# Altium PCB PCB.PcbDoc (part 9 of 11)
Units mm, origin at the board's own origin, x right, y up, seen from the top; angles counter-clockwise.
Board outline 100.46 x 70.51 mm, 10 copper layers (L1(SIG), L2(GND), L3(PWR), L4(SIG), L5(GND), L6(SIG), L7(GND), L8(SIG), L9(GND), L10(SIG)), stack 1.49 mm thick; 425 components, 324 nets, 2004 pads, 1425 vias.
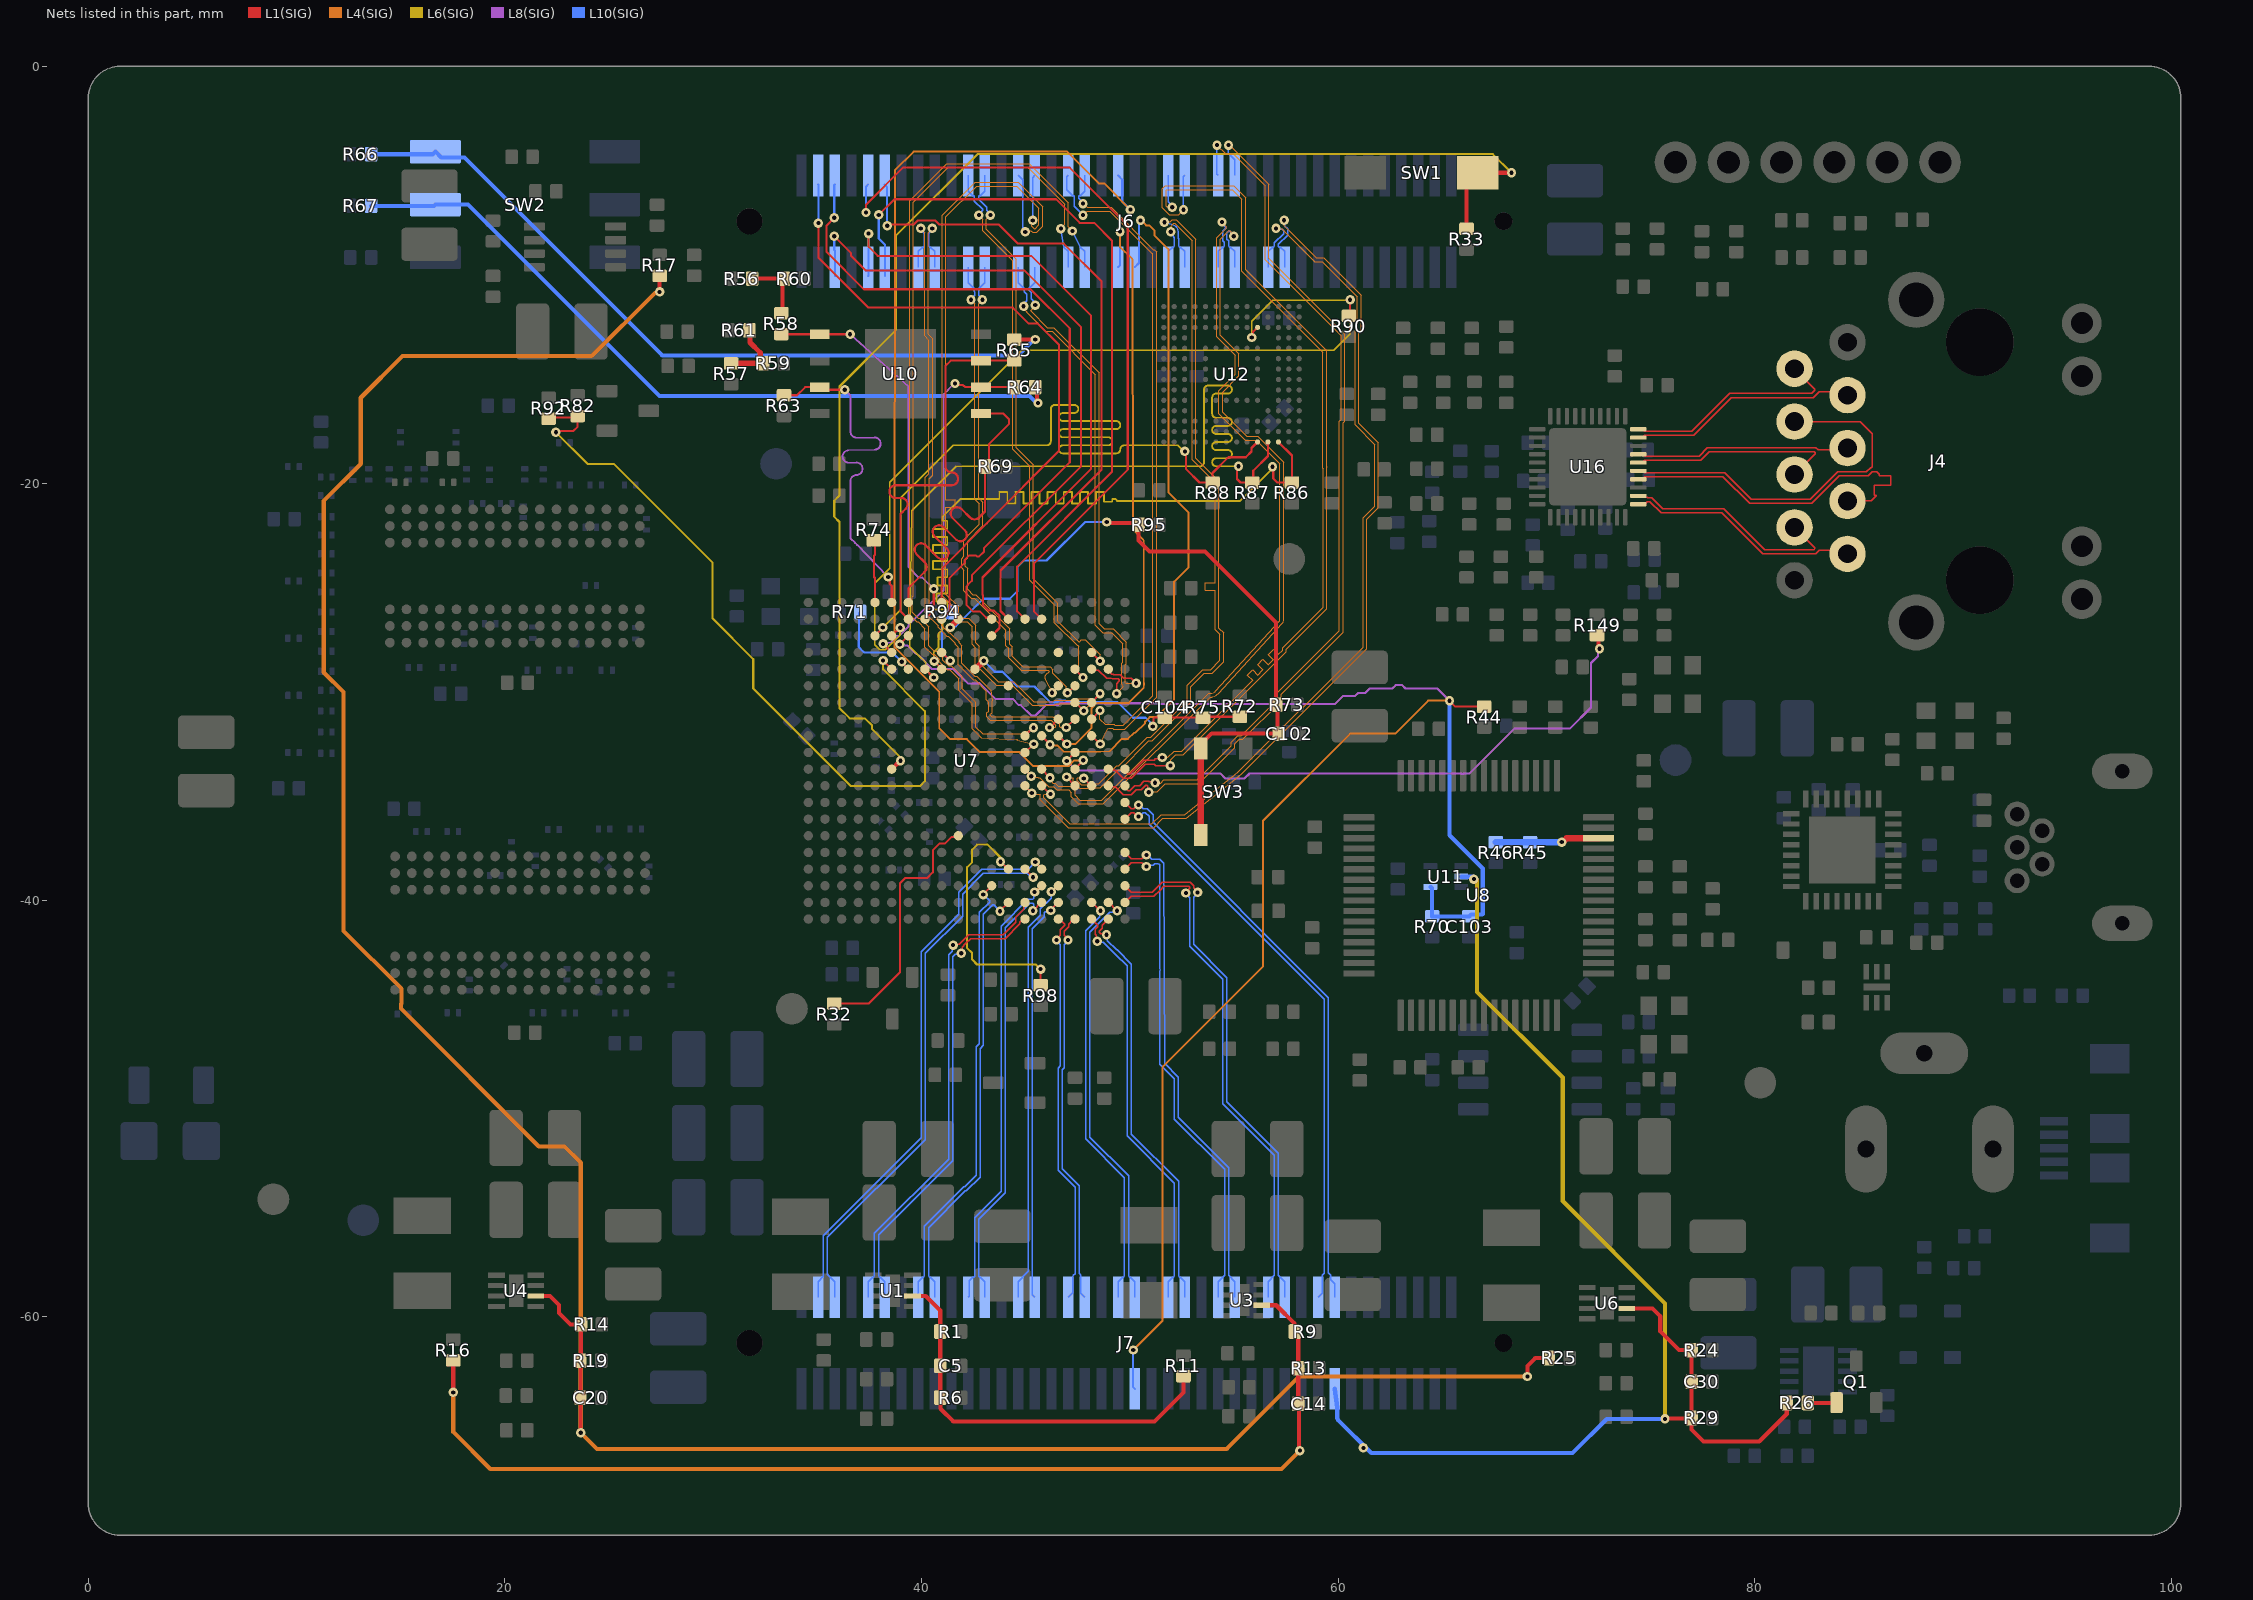
[diagram p16: the nets of this part, all layers, seen from the top]

## Via types
v1: diameter 0.45, hole 0.2, L1(SIG) to L10(SIG), tented both sides, 1194 vias
v2: diameter 0.45, hole 0.2, L1(SIG) to L10(SIG), 211 vias
v3: diameter 0.6, hole 0.25, L1(SIG) to L10(SIG), 9 vias
v4: diameter 0, hole 0.2, L1(SIG) to L10(SIG), tented both sides, 6 vias
v5: diameter 5, hole 3.2, L1(SIG) to L10(SIG), tented both sides, 4 vias
v6: diameter 0.45/0.45/0.45/0.45/0.45/0.45/0.45/0.45/0.45/0.45 (per signal layer), hole 0.2, L1(SIG) to L10(SIG), tented both sides, 1 vias

## Nets (pads, with @x,y where several pads share a name; then routed paths per layer and width w, separated by ;. In a path a pad name is that pad's centre, name@x,y a point inside that pad or via, vN(x,y) a via of type N, cw(c..) or ccw(c..) an arc to the next point about the centre after c; other vN are vias at no path point) (continued)
M1: R64.2 R67.1 SW2.2 | length 36.8
  L1(SIG) w0.2: R64.2@45.458,-15.371 45.545,-15.458 45.545,-16.085 v1(45.593,-16.133)
  L10(SIG) w0.2: R67.1@13.581,-6.671 16.599,-6.671 SW2.2@16.663,-6.608 18.234,-6.608 27.424,-15.798 45.19,-15.798 45.525,-16.133 v1(45.593,-16.133)
M2: R65.2 R66.1 SW2.3 | length 37.3
  L1(SIG) w0.2: R65.2@44.45,-13.093 44.454,-13.089 45.462,-13.089 v1(45.466,-13.085)
  L10(SIG) w0.2: R66.1@13.581,-4.195 16.536,-4.195 SW2.3@16.663,-4.068 16.949,-4.353 18.066,-4.353 27.559,-13.847 44.636,-13.847 45.398,-13.085 v1(45.466,-13.085)
M3: R56.2 R58.2 R60.1 | length 3.2
  L1(SIG) w0.2: R56.2@31.869,-10.164 R60.1@33.399,-10.164 33.336,-10.226 33.336,-11.76 R58.2@33.274,-11.823
M4: R57.2 R59.2 R61.1 | length 3.4
  L1(SIG) w0.254: R57.2@30.861,-14.236 30.865,-14.232 32.389,-14.232 R59.2@32.393,-14.228 32.261,-14.096 32.261,-13.723 31.77,-13.232 31.77,-12.678 R61.1@31.742,-12.65
MDI0_N: J4.3 U16.2 | length 11.1
  L1(SIG) w0.069: U16.2@74.307,-20.581 74.377,-20.651 74.839,-20.651 74.86,-20.672 75.047,-20.672 75.588,-21.213 78.509,-21.213 80.478,-23.182 82.853,-23.182 82.893,-23.142 82.893,-23.085 J4.3@81.915,-22.107
MDI0_P: J4.2 U16.1 | length 11.3
  L1(SIG) w0.069: U16.1@74.411,-20.995 74.711,-20.995 74.839,-20.867 74.966,-20.867 75.507,-21.408 78.428,-21.408 80.397,-23.378 82.934,-23.378 83.099,-23.214 84.292,-23.214 J4.2@84.455,-23.377
MDI1_N: J4.7 U16.5 | length 18.1
  L1(SIG) w0.069: U16.5@74.307,-19.381 74.611,-19.381 74.713,-19.483 78.557,-19.483 79.64,-20.566 79.834,-20.76 82.666,-20.76 83.984,-19.442 85.363,-19.442 85.566,-19.239 85.601,-19.239 85.643,-19.197 85.643,-18.907 85.643,-17.605 85.065,-17.027 J4.7@81.915,-17.027
MDI1_P: J4.4 U16.4 | length 16.9
  L1(SIG) w0.069: U16.4@74.307,-19.781 74.611,-19.781 74.713,-19.678 78.476,-19.678 79.753,-20.956 82.747,-20.956 84.065,-19.638 85.444,-19.638 85.647,-19.435 85.852,-19.435 85.979,-19.562 85.979,-19.582 85.979,-19.616 86.52,-19.616 86.52,-20.085 85.743,-20.085 85.743,-20.553 85.836,-20.553 85.836,-20.594 85.792,-20.637 85.593,-20.837 J4.4@84.455,-20.837 J4.4@84.455,-20.806
MDI2_N: J4.6 U16.7 | length 10.4
  L1(SIG) w0.069: U16.7@74.307,-18.581 74.611,-18.581 74.713,-18.683 77.333,-18.683 77.728,-18.287 82.942,-18.287 83.04,-18.385 84.367,-18.385 J4.6@84.455,-18.297
MDI2_P: J4.5 U16.6 | length 10.3
  L1(SIG) w0.069: U16.6@74.307,-18.981 74.611,-18.981 74.713,-18.878 77.414,-18.878 77.809,-18.483 82.861,-18.483 82.901,-18.523 82.901,-18.58 J4.5@81.915,-19.567
MDI3_N: J4.9 U16.10 | length 10.9
  L1(SIG) w0.069: U16.10@74.307,-17.381 74.611,-17.381 74.713,-17.483 76.986,-17.483 78.795,-15.674 82.741,-15.674 82.893,-15.522 82.893,-15.465 J4.9@81.915,-14.487
MDI3_P: J4.8 U16.9 | length 11.1
  L1(SIG) w0.069: U16.9@74.307,-17.781 74.611,-17.781 74.713,-17.678 77.067,-17.678 78.876,-15.87 82.822,-15.87 83.099,-15.594 84.292,-15.594 J4.8@84.455,-15.757
MIO43: J6.77 U7.A9 | length 31.5
  L1(SIG) w0.1: v1(35.052,-7.497) 35.052,-9.148 37.459,-11.555 44.39,-11.555 45.156,-12.321 45.591,-12.321 46.605,-13.335 46.605,-18.432 43.139,-21.899 43.139,-21.914 41.015,-24.038 41.015,-24.924 40.97,-24.969 U7.A9@40.97,-25.71
  L10(SIG) w0.1: J6.77@35.042,-5.64 35.052,-5.65 v1(35.052,-7.497)
MIO44: U7.F13
MIO45: J6.71 U7.B15 | length 37.1
  L1(SIG) w0.1: v1(37.338,-6.989) 37.338,-6.608 39.11,-4.836 47.123,-4.836 49.905,-7.618 49.905,-19.334 45.395,-23.844 45.395,-26.135 U7.B15@45.77,-26.51
  L10(SIG) w0.1: v1(37.338,-6.989) 37.338,-5.744 J6.71@37.442,-5.64
MIO46: U7.D16
MIO47: J6.70 U7.B14 | length 35.6
  L1(SIG) w0.1: v1(37.951,-7.106) 38.703,-6.354 46.463,-6.354 47.597,-7.487 48.289,-7.487 49.149,-8.347 49.149,-19.437 44.594,-23.992 44.594,-26.133 U7.B14@44.97,-26.51
  L10(SIG) w0.1: v1(37.951,-7.106) 37.951,-8.237 38.242,-8.528 J6.70@38.242,-10.04
MIO48: J6.76 U7.B12 | length 32.8
  L1(SIG) w0.1: v1(35.814,-8.132) 36.609,-8.927 36.609,-9.054 37.338,-9.783 44.951,-9.783 47.664,-12.495 47.664,-19.165 42.422,-24.407 42.422,-24.671 42.207,-24.886 42.207,-24.9 ; 42.244,-24.864 42.207,-24.9 ; U7.B12@43.37,-26.51 43.305,-26.445 43.105,-26.445 42.795,-26.135 42.465,-26.135 42.17,-25.84 42.17,-24.937 42.207,-24.9
  L10(SIG) w0.1: v1(35.814,-8.132) 35.814,-8.789 35.842,-8.817 J6.76@35.842,-10.04
MIO49: J6.72 U7.C12 | length 32.9
  L1(SIG) w0.1: v1(37.465,-8.005) 37.465,-8.64 37.895,-9.069 45.276,-9.069 48.133,-11.926 48.133,-19.308 42.932,-24.509 42.932,-25.335 42.945,-25.348 42.945,-25.815 43.23,-26.1 43.491,-26.1 43.745,-26.354 43.745,-26.935 U7.C12@43.37,-27.31
  L10(SIG) w0.1: J6.72@37.442,-10.04 37.465,-10.017 v1(37.465,-8.005)
MIO50: J6.69 U7.B13 | length 32
  L1(SIG) w0.1: v1(38.354,-7.624) 38.406,-7.571 39.616,-7.571 39.812,-7.376 40.672,-7.376 40.868,-7.571 43.724,-7.571 44.628,-8.475 46.676,-8.475 46.684,-8.483 46.837,-8.483 48.641,-10.287 48.641,-19.33 43.795,-24.176 43.795,-26.121 44.17,-26.496 U7.B13@44.17,-26.51
  L10(SIG) w0.1: J6.69@38.242,-5.64 38.227,-5.655 38.354,-5.782 v1(38.354,-7.624)
MIO51: J6.75 U7.B9 | length 33.5
  L1(SIG) w0.1: v1(35.814,-7.243) 35.439,-7.618 35.439,-8.873 37.237,-10.672 45.234,-10.672 47.117,-12.554 47.117,-18.982 43.007,-23.091 43.007,-23.263 42.772,-23.499 42.66,-23.499 42.621,-23.46 42.578,-23.46 42.567,-23.449 42.299,-23.449 42.079,-23.668 42.079,-23.801 41.352,-24.528 41.352,-26.128 U7.B9@40.97,-26.51
  L10(SIG) w0.1: v1(35.814,-7.243) 35.814,-5.668 J6.75@35.842,-5.64
MIO_VREF_0V9: C104.1 R72.1 R75.2 U7.E11 | length 14.7
  L1(SIG) w0.1: v1(51.105,-31.66) 51.13,-31.634 51.13,-31.296 51.189,-31.238 C104.1@51.689,-31.238 ; C104.1@51.689,-31.246 51.697,-31.238 53.506,-31.238 53.514,-31.246 53.564,-31.196 R72.1@55.288,-31.196
  L1(SIG) w0.3: U7.E11@42.57,-28.91 42.578,-28.91 42.981,-28.507 v1(42.99,-28.507)
  L10(SIG) w0.1: v1(42.99,-28.507) 43.52,-29.037 43.892,-29.037 44.598,-29.742 45.426,-29.742 46.183,-30.499 46.534,-30.499 46.612,-30.421 46.923,-30.421 47.001,-30.499 49.419,-30.499 50.165,-31.246 50.763,-31.246 51.105,-31.587 v1(51.105,-31.66)
NINIT: R32.1 U7.R10 | length 12.4
  L1(SIG) w0.1: R32.1@35.814,-44.97 37.457,-44.97 38.975,-43.452 38.975,-39.174 39.215,-38.935 40.275,-38.935 40.545,-38.665 40.545,-37.604 40.859,-37.29 40.986,-37.29 40.992,-37.285 41.125,-37.285 41.434,-36.976 41.704,-36.976 U7.R10@41.77,-36.91
NPROGRAM: R33.1 SW1.1 U7.L6 | length 64.5
  L1(SIG) w0.2: U7.L6@38.57,-33.71 38.581,-33.71 38.981,-33.31 v6(38.993,-33.31) ; R33.1@66.167,-7.767 SW1.1@66.167,-5.211 ; SW1.1@66.708,-5.08 v1(68.326,-5.08)
  L6(SIG) w0.1: v6(38.993,-33.31) 38.926,-33.243 38.926,-33.084 37.632,-31.79 37.632,-31.617 37.286,-31.271 36.556,-31.271 36.068,-30.784 36.068,-21.844 35.814,-21.59 35.814,-20.828 36.068,-20.574 36.068,-15.343 38.787,-12.624 38.787,-8.089 42.691,-4.185 67.431,-4.185 v1(68.326,-5.08)
NPUDC: R98.2 U7.U13 | length 12.2
  L1(SIG) w0.1: v1(43.792,-38.157) 43.805,-38.157 44.157,-38.51 U7.U13@44.17,-38.51 ; R98.2@45.72,-44.081 v1(45.72,-43.311)
  L6(SIG) w0.1: v1(43.792,-38.157) 43.792,-37.95 43.18,-37.338 42.672,-37.338 42.434,-37.576 42.434,-38.177 42.195,-38.416 42.195,-42.303 42.432,-42.54 42.432,-42.851 42.669,-43.088 45.496,-43.088 v1(45.72,-43.311) v1(45.72,-43.311)
NRST_FTDI: R45.1 R46.2 U8.14 | length 5
  L1(SIG) w0.3: v1(70.739,-37.215) 70.78,-37.215 70.971,-37.023 U8.14@72.506,-37.023
  L10(SIG) w0.3: R46.2@67.566,-37.215 R45.1@69.217,-37.215 v1(70.739,-37.215)
PG_1V0: C5.2 R1.1 R6.2 R11.1 U1.2 | length 19.6
  L1(SIG) w0.2: U1.2@39.57,-59.004 40.204,-59.004 40.902,-59.702 R1.1@40.902,-60.71 C5.2@40.902,-62.361 R6.2@40.902,-63.885 40.919,-63.901 40.919,-64.417 41.529,-65.028 51.181,-65.028 52.578,-63.631 R11.1@52.578,-62.861
PG_1V8: C14.2 R9.1 R13.2 R16.1 U3.2 | length 53.6
  L1(SIG) w0.2: R16.1@17.276,-62.299 17.476,-62.099 R16.1@17.526,-62.099 v1(17.526,-63.631) ; U3.2@56.344,-59.449 57.032,-59.449 57.893,-60.309 R9.1@57.893,-60.71 ; R9.1@57.92,-60.71 58.085,-60.875 R13.2@58.085,-62.462 C14.2@58.085,-64.176 58.126,-64.217 58.126,-66.384 v1(58.166,-66.425)
  L4(SIG) w0.2: v1(17.526,-63.631) 17.526,-65.536 19.3,-67.31 57.281,-67.31 v1(58.166,-66.425)
PG_1V35: C20.2 R14.1 R17.2 R19.2 R25.1 U4.2 | length 130.6
  L1(SIG) w0.2: U4.2@21.487,-59.004 22.17,-59.004 22.606,-59.44 22.606,-59.821 23.154,-60.369 R14.1@23.661,-60.369 23.661,-62.076 R19.2@23.63,-62.107 C20.2@23.63,-63.885 23.639,-63.893 23.639,-65.56 v1(23.647,-65.569) ; v1(27.432,-10.799) R17.2@27.432,-10.029 ; v1(69.088,-62.869) 69.088,-62.361 69.469,-61.98 R25.1@70.112,-61.98
  L4(SIG) w0.2: v1(23.647,-65.569) 23.647,-52.608 22.86,-51.821 21.629,-51.821 15.016,-45.208 15.016,-44.975 15.032,-44.959 15.032,-44.251 12.259,-41.478 12.259,-30.015 11.303,-29.059 11.303,-20.832 13.081,-19.054 13.081,-15.883 15.082,-13.882 24.172,-13.882 27.207,-10.846 27.384,-10.846 v1(27.432,-10.799) ; v1@23.749,-65.536 23.729,-65.556 23.729,-65.651 24.426,-66.347 54.653,-66.347 58.132,-62.869 v1(69.088,-62.869)
PG_3V3: C30.2 J7.16 R24.1 R26.1 R29.2 U6.2 U11.2 | length 64.4
  L1(SIG) w0.2: U6.2@73.857,-59.597 73.859,-59.599 75.09,-59.599 75.463,-59.973 75.463,-60.692 76.37,-61.599 R24.1@76.97,-61.599 C30.2@76.97,-63.123 R29.2@76.97,-64.86 ; v1(75.692,-64.901) 75.712,-64.88 76.95,-64.88 R29.2@76.97,-64.86 ; R26.1@81.542,-64.139 81.54,-64.141 81.54,-64.671 80.218,-65.993 77.546,-65.993 76.97,-65.417 R29.2@76.97,-64.86
  L6(SIG) w0.2: v1(66.519,-38.993) 66.524,-38.998 66.645,-38.998 66.675,-39.028 66.675,-44.41 70.785,-48.52 70.785,-54.449 75.692,-59.356 v1(75.692,-64.901)
  L10(SIG) w0.2: J7.16@59.842,-63.459 59.958,-64.359 59.958,-64.831 ccw(c60.158,-64.831) 60.015,-64.972 ; 60.016,-64.973 61.591,-66.548 71.251,-66.548 72.898,-64.901 v1(75.692,-64.901) ; U11.2@65.913,-38.866 65.925,-38.878 66.471,-38.878 66.519,-38.926 v1(66.519,-38.993)
  other v1: 61.214,-66.294
PL_B5_L5_N: J6.52 U7.E19 | length 24.9
  L1(SIG) w0.069: U7.E19@48.97,-28.91 48.97,-28.993 49.132,-29.155 49.2,-29.155 49.229,-29.183 49.536,-29.183 49.703,-29.35 50.067,-29.35 v1(50.307,-29.59)
  L4(SIG) w0.052: v1(45.466,-11.434) 45.466,-11.5 45.251,-11.715 46.048,-12.512 46.302,-12.512 ; v1(50.307,-29.59) 50.299,-29.599 49.816,-29.599 49.785,-29.568 49.785,-28.706 49.836,-28.656 49.836,-27.615 49.204,-26.983 48.786,-26.983 48.526,-26.723 48.526,-14.693 46.345,-12.512 ; 46.302,-12.512 46.345,-12.512 ; 46.302,-12.512 46.345,-12.512
  L10(SIG) w0.069: J6.52@45.442,-9.611 45.442,-10.361 45.226,-10.576 45.18,-10.576 45.14,-10.617 45.14,-10.704 45.26,-10.824 45.26,-11.127 45.466,-11.334 v1(45.466,-11.434)
PL_B5_L5_P: J6.54 U7.E18 | length 25.6
  L1(SIG) w0.069: U7.E18@48.206,-28.946 U7.E18@48.17,-28.91 48.222,-28.962 48.498,-28.962 48.887,-29.35 49.119,-29.35 49.148,-29.379 49.455,-29.379 49.495,-29.419 49.495,-29.476 49.37,-29.601 v1(49.37,-30.087)
  L4(SIG) w0.052: v1(44.905,-11.492) 44.905,-11.6 45.054,-11.749 45.054,-11.771 45.974,-12.69 46.271,-12.69 48.347,-14.767 48.347,-26.797 48.712,-27.162 49.13,-27.162 49.658,-27.689 49.658,-28.582 49.607,-28.632 49.607,-29.642 49.689,-29.725 49.689,-29.768 v1(49.37,-30.087)
  L10(SIG) w0.069: J6.54@44.642,-9.611 44.642,-10.361 44.858,-10.576 44.904,-10.576 44.944,-10.617 44.944,-10.785 45.064,-10.905 45.064,-11.229 44.905,-11.389 v1(44.905,-11.492)
PL_B34_L4_N: J7.63 U7.W13 | length 21.4
  L1(SIG) w0.069: v1(43.77,-40.532) 43.77,-40.521 44.17,-40.121 U7.W13@44.17,-40.11
  L10(SIG) w0.069: J7.63@40.642,-59.059 40.642,-58.309 40.426,-58.093 40.38,-58.093 40.34,-58.053 40.34,-55.725 42.111,-53.955 42.161,-53.955 42.817,-53.299 42.817,-47.126 42.973,-46.97 42.973,-40.667 43.411,-40.23 43.468,-40.23 v1(43.77,-40.532)
PL_B34_L4_P: J7.65 U7.V12 | length 21.5
  L1(SIG) w0.069: v1(42.97,-39.732) 42.97,-39.721 43.37,-39.321 U7.V12@43.37,-39.31
  L10(SIG) w0.069: J7.65@39.842,-59.059 39.842,-58.309 40.058,-58.093 40.104,-58.093 40.144,-58.053 40.144,-55.644 42.03,-53.759 42.08,-53.759 42.621,-53.218 42.621,-47.045 42.777,-46.888 42.777,-40.586 43.272,-40.091 43.272,-40.034 v1(42.97,-39.732)
PL_B34_L7_N: J7.45 U7.Y17 | length 19
  L1(SIG) w0.069: v1(47.032,-41.914) 47.032,-41.861 46.855,-41.684 46.855,-41.501 47.068,-41.288 47.068,-41.15 47.244,-40.974 47.305,-40.974 U7.Y17@47.37,-40.91
  L10(SIG) w0.069: v1(47.032,-41.914) 47.032,-41.966 46.855,-42.143 46.855,-48.041 46.755,-48.14 46.755,-52.892 47.569,-53.706 47.569,-57.92 47.645,-57.996 47.645,-58.862 J7.45@47.842,-59.059
PL_B34_L7_P: J7.47 U7.Y16 | length 19.1
  L1(SIG) w0.069: v1(46.482,-41.914) 46.482,-41.861 46.659,-41.684 46.659,-41.42 46.872,-41.207 46.872,-41.15 46.631,-40.91 U7.Y16@46.57,-40.91
  L10(SIG) w0.069: v1(46.482,-41.914) 46.482,-41.966 46.659,-42.143 46.659,-47.96 46.56,-48.059 46.56,-52.973 47.374,-53.787 47.374,-57.935 47.298,-58.011 47.258,-58.051 47.258,-58.843 J7.47@47.042,-59.059
PL_B34_L8_N: J7.69 U7.Y14 | length 22.4
  L1(SIG) w0.069: v1(41.91,-42.549) 41.947,-42.511 41.947,-42.261 42.103,-42.105 42.357,-41.851 44.014,-41.851 44.725,-41.14 44.725,-41.072 44.887,-40.91 U7.Y14@44.97,-40.91
  L10(SIG) w0.069: J7.69@38.242,-59.059 38.242,-58.309 38.026,-58.093 37.98,-58.093 37.94,-58.053 37.94,-56.074 41.496,-52.518 41.496,-42.712 41.622,-42.586 41.873,-42.586 v1(41.91,-42.549)
PL_B34_L8_P: J7.71 U7.W14 | length 23.2
  L1(SIG) w0.069: v1(41.521,-42.16) 41.558,-42.122 41.809,-42.122 42.276,-41.655 43.933,-41.655 44.529,-41.058 44.529,-40.826 44.918,-40.438 44.918,-40.162 U7.W14@44.97,-40.11
  L10(SIG) w0.069: J7.71@37.442,-59.059 37.442,-58.309 37.658,-58.093 37.704,-58.093 37.744,-58.053 37.744,-55.993 41.3,-52.437 41.3,-42.631 41.484,-42.447 41.484,-42.197 v1(41.521,-42.16)
PL_B34_L10_N: J7.57 U7.W15 | length 21.2
  L1(SIG) w0.069: v1(45.347,-40.51) 45.359,-40.51 45.759,-40.11 U7.W15@45.77,-40.11
  L10(SIG) w0.069: J7.57@43.042,-59.059 43.042,-58.309 42.826,-58.093 42.791,-58.093 42.75,-58.053 42.75,-55.319 44.024,-54.045 44.024,-41.325 45.191,-40.157 45.349,-40.157 45.389,-40.198 45.389,-40.468 v1(45.347,-40.51)
PL_B34_L10_P: J7.59 U7.V15 | length 21.4
  L1(SIG) w0.069: v1(45.431,-39.61) 45.45,-39.61 45.75,-39.31 U7.V15@45.77,-39.31
  L10(SIG) w0.069: J7.59@42.242,-59.059 42.283,-59.018 42.283,-58.268 42.458,-58.093 42.514,-58.093 42.555,-58.053 42.555,-55.238 43.828,-53.964 43.828,-41.244 45.11,-39.962 45.349,-39.962 45.389,-39.922 45.389,-39.651 v1(45.431,-39.61)
PL_B34_L11_N: J7.77 U7.U15 | length 27
  L1(SIG) w0.069: v1(45.465,-38.168) 45.465,-38.186 45.77,-38.491 U7.U15@45.77,-38.51
  L10(SIG) w0.069: J7.77@35.042,-59.059 35.042,-58.309 35.288,-58.063 35.288,-56.11 39.983,-51.415 39.983,-42.48 41.778,-40.685 41.778,-39.632 42.894,-38.516 45.116,-38.516 v1(45.465,-38.168)
PL_B34_L11_P: J7.75 U7.U14 | length 26.6
  L1(SIG) w0.069: U7.U14@44.97,-38.51 v1(45.361,-38.9)
  L10(SIG) w0.069: J7.75@35.842,-59.059 35.842,-58.309 35.484,-57.95 35.484,-56.192 40.179,-51.496 40.179,-42.561 41.974,-40.766 41.974,-39.713 42.975,-38.712 45.086,-38.712 45.274,-38.9 v1(45.361,-38.9)
PL_B34_L14_N: J7.17 U7.P20 | length 28.4
  L1(SIG) w0.069: U7.P20@49.77,-36.11 50.072,-35.807 50.189,-35.807 50.366,-35.985 v1(50.419,-35.985)
  L10(SIG) w0.069: v1@50.419,-35.807 v1(50.419,-35.985) 50.472,-35.985 50.649,-35.807 50.75,-35.807 50.924,-35.981 50.924,-36.349 50.922,-36.351 ccw(c51.063,-36.216) 50.925,-36.354 59.33,-44.759 59.33,-57.903 59.237,-57.996 59.237,-58.864 J7.17@59.042,-59.059
PL_B34_L14_P: J7.15 U7.N20 | length 28.5
  L1(SIG) w0.069: U7.N20@49.77,-35.31 50.072,-35.612 50.189,-35.612 50.366,-35.435 v1(50.419,-35.435)
  L10(SIG) w0.069: v1(50.419,-35.435) 50.472,-35.435 50.649,-35.612 50.831,-35.612 51.12,-35.9 51.12,-36.272 59.526,-44.678 59.526,-57.878 59.645,-57.997 59.645,-58.214 59.842,-58.411 J7.15@59.842,-59.059
PL_B34_L15_N: J7.29 U7.U20 | length 24.1
  L1(SIG) w0.069: U7.U20@49.77,-38.51 50.072,-38.207 50.57,-38.207 50.747,-38.385 v1(50.8,-38.385)
  L10(SIG) w0.069: v1(50.8,-38.385) 50.858,-38.326 51.128,-38.326 51.207,-38.248 51.377,-38.248 51.415,-38.285 51.435,-38.306 51.435,-38.362 51.435,-43.225 cw(c51.094,-43.337) 51.446,-43.409 51.435,-47.826 51.435,-47.882 51.455,-47.903 52.137,-48.584 52.137,-50.512 54.551,-52.926 54.551,-58 54.242,-58.309 J7.29@54.242,-59.059
PL_B34_L15_P: J7.27 U7.T20 | length 24.5
  L1(SIG) w0.069: U7.T20@49.77,-37.71 50.072,-38.012 50.187,-38.012 50.57,-38.012 50.747,-37.835 v1(50.8,-37.835)
  L10(SIG) w0.069: v1(50.8,-37.835) 50.859,-37.835 51.061,-38.037 51.443,-38.037 51.611,-38.204 51.631,-38.225 51.631,-38.443 51.67,-47.841 52.332,-48.503 52.332,-50.431 54.746,-52.845 54.746,-58.013 55.042,-58.309 J7.27@55.042,-59.059
PL_B34_L16_N: J7.23 U7.W20 | length 25.1
  L1(SIG) w0.069: U7.W20@49.77,-40.11 50.072,-39.807 50.256,-39.807 51.159,-39.807 51.452,-39.514 51.635,-39.332 52.828,-39.332 52.876,-39.38 52.876,-39.436 52.692,-39.62 v1(52.692,-39.66)
  L10(SIG) w0.069: v1(52.692,-39.66) 52.692,-39.7 52.876,-39.883 52.876,-42.208 54.463,-43.796 54.463,-49.767 56.937,-52.241 56.937,-58.014 56.642,-58.309 J7.23@56.642,-59.059
PL_B34_L16_P: J7.21 U7.V20 | length 25.4
  L1(SIG) w0.069: U7.V20@49.77,-39.31 50.072,-39.612 51.078,-39.612 51.554,-39.136 52.909,-39.136 53.071,-39.299 53.071,-39.404 53.255,-39.588 v1(53.255,-39.628)
  L10(SIG) w0.069: v1(53.255,-39.628) 53.255,-39.667 53.071,-39.851 53.071,-42.127 54.659,-43.715 54.659,-49.686 57.133,-52.16 57.133,-57.999 57.442,-58.309 J7.21@57.442,-59.059
PL_B34_L17_N: J7.33 U7.Y19 | length 20.2
  L1(SIG) w0.069: v1(48.884,-41.657) 48.843,-41.617 48.598,-41.617 48.528,-41.546 48.528,-41.489 48.668,-41.35 48.668,-41.212 U7.Y19@48.97,-40.91
  L10(SIG) w0.069: v1(48.884,-41.657) 48.925,-41.698 48.925,-41.943 49.373,-42.391 49.388,-42.391 50.065,-43.068 50.065,-51.232 52.34,-53.507 52.34,-58.053 52.38,-58.093 52.426,-58.093 52.642,-58.309 J7.33@52.642,-59.059
PL_B34_L17_P: J7.35 U7.Y18 | length 20.2
  L1(SIG) w0.069: U7.Y18@48.17,-40.91 48.472,-41.212 48.472,-41.269 48.332,-41.408 48.332,-41.627 48.394,-41.689 48.394,-41.934 v1(48.435,-41.975)
  L10(SIG) w0.069: v1(48.435,-41.975) 48.476,-42.016 48.721,-42.016 49.292,-42.587 49.307,-42.587 49.87,-43.149 49.87,-51.313 52.144,-53.588 52.144,-58.053 52.104,-58.093 52.058,-58.093 51.842,-58.309 J7.35@51.842,-59.059
PL_B34_L18_N: J7.51 U7.W16 | length 19.6
  L1(SIG) w0.069: v1(46.206,-40.497) 46.206,-40.462 46.559,-40.11 U7.W16@46.57,-40.11
  L10(SIG) w0.069: J7.51@45.442,-59.059 45.327,-58.944 45.327,-50.574 45.327,-50.493 45.327,-41.384 45.906,-40.805 45.906,-40.604 45.946,-40.563 46.14,-40.563 v1(46.206,-40.497)
PL_B34_L18_P: J7.53 U7.V16 | length 20.6
  L1(SIG) w0.069: v1(46.239,-39.597) 46.261,-39.597 46.548,-39.31 U7.V16@46.57,-39.31
  L10(SIG) w0.069: J7.53@44.642,-59.059 44.642,-58.309 45.131,-57.819 45.131,-41.303 45.71,-40.724 45.71,-40.423 46.223,-39.91 46.223,-39.613 v1(46.239,-39.597)
PL_B34_L22_N: J7.39 U7.W19 | length 20.8
  L1(SIG) w0.069: U7.W19@48.97,-40.11 48.981,-40.11 49.381,-40.51 v1(49.393,-40.51)
  L10(SIG) w0.069: v1(49.393,-40.51) 49.328,-40.574 49.04,-40.574 48.076,-41.539 48.076,-51.371 49.94,-53.235 49.94,-58.053 49.98,-58.093 50.026,-58.093 50.242,-58.309 J7.39@50.242,-59.059
PL_B34_L22_P: J7.41 U7.W18 | length 20.4
  L1(SIG) w0.069: U7.W18@48.17,-40.11 48.181,-40.11 48.581,-40.51 v1(48.593,-40.51)
  L10(SIG) w0.069: v1(48.593,-40.51) 48.547,-40.555 48.547,-40.791 47.88,-41.458 47.88,-51.452 49.744,-53.316 49.744,-58.053 49.704,-58.093 49.658,-58.093 49.442,-58.309 J7.41@49.442,-59.059
PL_B35_IO25: J6.40 U7.J15 | length 34.5
  L1(SIG) w0.103: U7.J15@45.77,-32.11 45.77,-32.121 46.17,-32.521 v1(46.17,-32.532)
  L4(SIG) w0.092: v1(46.17,-32.532) 46.22,-32.582 46.533,-32.582 46.828,-32.877 47.656,-32.877 47.732,-32.877 48.587,-32.875 ccw(c48.587,-32.504) 48.606,-32.875 49.035,-32.853 49.626,-32.262 49.911,-32.262 50.208,-31.965 50.273,-31.965 50.734,-31.504 50.734,-31.434 50.951,-31.216 51.26,-31.216 52.133,-30.344 52.133,-24.706 52.826,-24.012 52.826,-21.394 51.858,-20.425 51.858,-8.747 51.181,-8.071 51.181,-7.847 50.94,-7.606 50.785,-7.606 50.545,-7.366 v1(50.512,-7.366)
  L10(SIG) w0.103: J6.40@50.242,-9.611 50.44,-9.412 50.44,-7.532 50.512,-7.46 v1(50.512,-7.366)
PL_B35_L3_N: J6.57 U7.D18 | length 26.9
  L1(SIG) w0.069: U7.D18@48.17,-28.11 48.17,-28.115 48.576,-28.521 v1(48.576,-28.526)
  L4(SIG) w0.052: v1(43.307,-7.116) 43.307,-7.129 43.121,-7.315 43.121,-7.796 44.554,-9.229 44.554,-18.282 45.373,-19.101 45.373,-24.57 46.552,-25.748 46.552,-26.6 47.546,-27.594 47.589,-27.594 47.676,-27.506 47.864,-27.506 48.576,-28.218 v1(48.576,-28.526)
  L10(SIG) w0.069: J6.57@43.042,-5.211 43.042,-5.961 42.826,-6.176 42.78,-6.176 42.74,-6.217 42.74,-6.358 43.13,-6.748 43.13,-6.886 43.307,-7.063 v1(43.307,-7.116)
PL_B35_L3_P: J6.59 U7.E17 | length 27.1
  L1(SIG) w0.069: U7.E17@47.37,-28.91 47.37,-28.92 47.752,-29.302 v1(47.752,-29.312)
  L4(SIG) w0.052: v1(42.757,-7.116) 42.757,-7.129 42.943,-7.315 42.943,-7.87 44.375,-9.303 44.375,-18.356 45.194,-19.175 45.194,-24.644 46.373,-25.822 46.373,-26.674 47.472,-27.772 47.514,-27.772 47.544,-27.803 47.544,-29.092 47.752,-29.3 v1(47.752,-29.312)
  L10(SIG) w0.069: J6.59@42.242,-5.211 42.242,-5.961 42.458,-6.176 42.504,-6.176 42.544,-6.217 42.544,-6.439 42.934,-6.829 42.934,-6.886 42.757,-7.063 v1(42.757,-7.116)
PL_B35_L6_N: J6.58 U7.F17 | length 24.6
  L1(SIG) w0.069: v1(47.004,-30.048) 47.018,-30.048 47.356,-29.71 U7.F17@47.37,-29.71
  L4(SIG) w0.052: v1(42.926,-11.18) 42.926,-11.193 42.74,-11.379 42.74,-20.68 42.948,-20.887 42.948,-22.035 42.212,-22.771 42.212,-23.57 42.103,-23.678 42.103,-23.969 42.212,-24.077 42.212,-25.079 42.47,-25.337 42.61,-25.337 44.236,-26.963 44.236,-27.718 44.363,-27.845 44.363,-28.3 44.857,-28.794 46.172,-28.794 46.306,-28.929 46.306,-29.108 46.944,-29.745 46.944,-29.988 v1(47.004,-30.048)
  L10(SIG) w0.069: v1(42.926,-11.18) 42.926,-11.127 42.749,-10.95 42.749,-10.713 42.74,-10.704 42.74,-10.617 42.78,-10.576 42.826,-10.576 43.042,-10.361 J6.58@43.042,-9.611
PL_B35_L6_P: J6.60 U7.F16 | length 24.4
  L1(SIG) w0.069: v1(46.274,-30.046) 46.274,-30.026 46.57,-29.73 U7.F16@46.57,-29.71
  L4(SIG) w0.052: v1(42.376,-11.18) 42.376,-11.193 42.562,-11.379 42.562,-20.754 42.769,-20.961 42.769,-21.961 42.033,-22.697 42.033,-23.496 41.925,-23.604 41.925,-24.043 42.033,-24.151 42.033,-25.153 42.396,-25.516 42.536,-25.516 44.058,-27.037 44.058,-27.792 44.185,-27.919 44.185,-28.374 44.783,-28.973 46.098,-28.973 46.128,-29.003 46.128,-29.046 46.098,-29.076 46.088,-29.076 46.014,-29.132 ccw(c46.15,-29.312) 45.934,-29.378 ccw(c46.15,-29.312) 45.949,-29.416 v1(46.274,-30.046)
  L10(SIG) w0.069: J6.60@42.242,-9.611 42.242,-10.361 42.458,-10.576 42.504,-10.576 42.544,-10.617 42.544,-10.785 42.553,-10.794 42.553,-10.95 42.376,-11.127 v1(42.376,-11.18)
PL_B35_L7_N: J6.29 U7.M20 | length 41.5
  L1(SIG) w0.069: U7.M20@49.77,-34.51 49.77,-34.593 49.932,-34.755 49.989,-34.755 50.234,-34.51 50.469,-34.51 50.68,-34.299 50.906,-34.299 50.932,-34.325 51.176,-34.325 v1(51.217,-34.367)
  L4(SIG) w0.052: v1(51.217,-34.367) 51.23,-34.379 51.489,-34.379 51.637,-34.232 53.229,-34.232 54.862,-32.599 54.862,-32.419 55.173,-32.109 55.352,-32.109 57.092,-30.369 57.092,-30.051 60.066,-27.077 60.066,-17.019 60.146,-16.939 60.146,-12.913 56.493,-9.261 56.493,-5.697 54.961,-4.164 54.597,-4.164 v1(54.187,-3.754)
  L10(SIG) w0.069: v1(54.187,-3.754) 54.187,-5.156 J6.29@54.242,-5.211
PL_B35_L7_P: J6.27 U7.M19 | length 42.8
  L1(SIG) w0.069: U7.M19@48.97,-34.51 49.022,-34.562 49.298,-34.562 49.687,-34.95 50.07,-34.95 50.315,-34.705 50.55,-34.705 50.761,-34.495 50.825,-34.495 50.868,-34.538 50.868,-34.781 v1(50.91,-34.823)
  L4(SIG) w0.052: v1(50.91,-34.823) 50.935,-34.797 51.324,-34.797 51.711,-34.411 53.303,-34.411 55.041,-32.673 55.041,-32.493 55.247,-32.288 55.426,-32.288 57.271,-30.443 57.271,-30.125 60.245,-27.151 60.245,-17.093 60.325,-17.013 60.325,-12.839 56.672,-9.187 56.672,-5.623 54.803,-3.754 v1(54.737,-3.754)
  L10(SIG) w0.069: v1(54.737,-3.754) 54.737,-4.156 55.042,-4.461 J6.27@55.042,-5.211
PL_B35_L8_N: J6.36 U7.M18 | length 36.1
  L1(SIG) w0.069: v1(47.79,-34.154) 47.802,-34.154 48.158,-34.51 U7.M18@48.17,-34.51
  L4(SIG) w0.052: v1(47.79,-34.154) 47.756,-34.121 47.5,-34.121 47.469,-34.151 47.469,-34.262 47.665,-34.457 47.982,-34.457 48.018,-34.421 48.514,-34.421 49.377,-33.558 49.464,-33.558 50.846,-32.175 51.013,-32.175 52.76,-30.428 52.76,-29.68 53.51,-28.93 53.877,-28.93 54.322,-28.485 54.322,-27.23 54.102,-27.009 54.102,-26.67 54.102,-25.113 53.613,-25.113 53.613,-24.762 54.102,-24.762 54.102,-24.384 54.102,-19.956 52.995,-18.849 52.995,-8.356 52.154,-7.515 52.111,-7.515 51.982,-7.644 51.982,-7.898 v1(51.964,-7.916)
  L10(SIG) w0.069: J6.36@51.842,-9.611 51.842,-8.861 52.058,-8.645 52.104,-8.645 52.144,-8.605 52.144,-8.436 52.144,-8.247 ccw(c52.075,-8.247) 52.135,-8.213 v1(51.964,-7.916)
PL_B35_L8_P: J6.34 U7.M17 | length 36.9
  L1(SIG) w0.069: v1(46.97,-34.087) 46.97,-34.098 47.37,-34.498 U7.M17@47.37,-34.51
  L4(SIG) w0.052: v1(46.97,-34.087) 47.004,-34.121 47.26,-34.121 47.291,-34.151 47.291,-34.336 47.591,-34.636 48.056,-34.636 48.092,-34.599 48.588,-34.599 49.451,-33.737 49.538,-33.737 50.92,-32.354 51.087,-32.354 52.939,-30.502 52.939,-29.754 53.584,-29.109 53.951,-29.109 54.501,-28.559 54.501,-27.156 54.281,-26.935 54.281,-24.335 54.281,-19.882 53.174,-18.775 53.174,-9.712 53.174,-8.282 52.228,-7.336 52.037,-7.336 51.935,-7.438 51.68,-7.438 v1(51.662,-7.456)
  L10(SIG) w0.069: v1(51.662,-7.456) 52.063,-7.571 cw(c51.964,-7.916) 52.323,-7.898 52.34,-8.234 cw(c52.075,-8.247) 52.34,-8.247 52.34,-8.517 52.34,-8.605 52.38,-8.645 52.426,-8.645 52.642,-8.861 J6.34@52.642,-9.611
PL_B35_L9_N: J6.35 U7.L20 | length 42.9
  L1(SIG) w0.069: U7.L20@49.77,-33.71 49.77,-33.793 49.932,-33.955 49.989,-33.955 50.666,-33.278 51.17,-33.278 51.234,-33.213 51.499,-33.213 v1(51.562,-33.151)
  L4(SIG) w0.052: v1(51.562,-33.151) 51.572,-33.141 51.834,-33.141 52.125,-32.851 52.489,-32.851 55.878,-29.462 55.896,-29.443 55.644,-29.192 55.893,-28.943 56.145,-29.195 56.393,-28.946 56.142,-28.695 56.39,-28.446 56.642,-28.697 56.891,-28.449 56.656,-28.214 56.905,-27.965 57.139,-28.2 57.345,-27.994 57.345,-27.89 57.345,-27.877 59.279,-25.943 59.279,-19.289 59.266,-19.276 59.266,-13.704 55.379,-9.816 55.379,-6.359 54.913,-5.894 51.77,-5.894 51.739,-5.924 51.739,-6.685 51.77,-6.715 52.022,-6.715 v1(52.042,-6.735)
  L10(SIG) w0.069: J6.35@51.842,-5.211 51.842,-6.471 52.042,-6.671 v1(52.042,-6.735)
PL_B35_L9_P: J6.33 U7.L19 | length 43.8
  L1(SIG) w0.069: U7.L19@48.97,-33.71 49.022,-33.762 49.298,-33.762 49.687,-34.15 50.07,-34.15 50.747,-33.473 51.17,-33.473 51.236,-33.54 v1(51.951,-33.54)
  L4(SIG) w0.052: v1(51.951,-33.54) 51.961,-33.53 51.961,-33.267 52.199,-33.029 52.563,-33.029 57.524,-28.068 57.524,-27.951 59.458,-26.017 59.458,-19.215 59.445,-19.202 59.445,-13.63 55.557,-9.742 55.557,-7.16 55.557,-6.285 54.987,-5.715 51.696,-5.715 51.561,-5.85 51.561,-6.759 51.887,-7.086 52.35,-7.086 v1(52.578,-6.858)
  L10(SIG) w0.069: v1(52.578,-6.858) 52.578,-5.275 J6.33@52.642,-5.211
PL_B35_L11_N: J6.41 U7.L17 | length 50.8
  L1(SIG) w0.103: U7.L17@47.37,-33.71 47.37,-33.698 47.77,-33.298 v1(47.77,-33.287)
  L4(SIG) w0.092: v1(47.77,-33.287) 47.346,-33.287 47.067,-33.567 45.374,-33.567 44.704,-32.897 42.803,-32.897 42.177,-32.27 41.372,-32.27 40.854,-31.752 40.854,-30.003 38.713,-27.862 38.713,-16.083 38.725,-16.071 38.725,-4.963 39.624,-4.064 46.99,-4.064 48.514,-5.588 48.768,-5.588 v1(50.032,-6.852)
  L10(SIG) w0.103: J6.41@49.442,-5.211 49.64,-5.409 49.64,-6.46 v1(50.032,-6.852)
PL_B35_L13_N: J6.64 U7.H17 | length 31.6
  L1(SIG) w0.069: v1(46.947,-31.71) 46.959,-31.71 47.359,-31.31 U7.H17@47.37,-31.31
  L4(SIG) w0.052: v1(40.517,-7.751) 40.517,-7.764 40.331,-7.95 40.331,-12.839 40.538,-13.045 40.538,-19.597 40.367,-19.768 40.367,-26.141 40.984,-26.758 40.984,-26.837 41.3,-27.152 41.362,-27.152 41.804,-27.594 41.804,-27.649 41.944,-27.789 41.944,-28.626 42.563,-29.245 42.644,-29.245 43.278,-29.879 43.305,-29.905 43.335,-29.935 43.4,-30.418 43.4,-30.994 43.314,-31.08 43.314,-31.123 43.385,-31.194 46.312,-31.194 46.637,-31.518 46.637,-31.679 46.667,-31.71 v1(46.947,-31.71)
  L10(SIG) w0.069: v1(40.517,-7.751) 40.517,-7.803 40.34,-7.98 40.34,-8.605 40.38,-8.645 40.426,-8.645 40.642,-8.861 J6.64@40.642,-9.611
PL_B35_L13_P: J6.66 U7.H16 | length 31.6
  L1(SIG) w0.069: v1(46.147,-31.71) 46.172,-31.686 46.215,-31.686 U7.H16@46.57,-31.31
  L4(SIG) w0.052: v1(39.967,-7.751) 39.967,-7.764 40.153,-7.95 40.153,-12.913 40.359,-13.119 40.359,-19.523 40.189,-19.694 40.189,-26.215 40.806,-26.832 40.806,-26.911 41.226,-27.331 41.288,-27.331 41.625,-27.668 41.625,-27.723 41.765,-27.863 41.765,-28.7 42.489,-29.424 42.57,-29.424 43.114,-29.968 43.114,-30.386 43.221,-30.492 43.221,-30.92 43.135,-31.006 43.135,-31.197 43.311,-31.373 46.238,-31.373 46.458,-31.592 46.458,-31.679 46.428,-31.71 v1(46.147,-31.71)
  L10(SIG) w0.069: J6.66@39.842,-9.611 39.842,-8.861 40.058,-8.645 40.104,-8.645 40.144,-8.605 40.144,-7.98 39.967,-7.803 v1(39.967,-7.751)
PL_B35_L14_N: J6.47 U7.H18 | length 32
  L1(SIG) w0.069: U7.H18@48.17,-31.31 48.17,-31.304 48.57,-30.904 v1(48.57,-30.898)
  L4(SIG) w0.052: v1(47.758,-7.112) 47.771,-7.112 47.957,-6.926 49.046,-6.926 51.013,-8.892 51.065,-8.945 51.109,-8.945 51.109,-30.198 49.696,-31.61 49.29,-31.61 49.245,-31.566 48.826,-31.566 48.57,-31.31 v1(48.57,-30.898)
  L10(SIG) w0.069: J6.47@47.042,-5.211 46.985,-5.268 46.985,-5.903 47.258,-6.176 47.304,-6.176 47.344,-6.217 47.344,-6.699 v1(47.758,-7.112)
PL_B35_L14_P: J6.45 U7.J18 | length 31.9
  L1(SIG) w0.069: U7.J18@48.17,-32.11 48.181,-32.11 48.576,-32.504 v1(48.587,-32.504)
  L4(SIG) w0.052: v1(47.752,-6.562) 47.766,-6.562 47.951,-6.748 49.12,-6.748 51.139,-8.766 51.183,-8.766 51.287,-8.871 51.287,-30.272 49.77,-31.789 49.216,-31.789 49.171,-31.745 48.983,-31.745 48.953,-31.775 v1(48.587,-32.504)
  L10(SIG) w0.069: v1(47.752,-6.562) 47.752,-6.522 47.54,-6.31 47.54,-6.217 47.58,-6.176 47.626,-6.176 47.842,-5.961 J6.45@47.842,-5.211
PL_B35_L16_N: J6.51 U7.G18 | length 39.8
  L1(SIG) w0.069: U7.G18@48.17,-30.51 48.17,-30.498 48.57,-30.098 v1(48.57,-30.087)
  L4(SIG) w0.052: v1(45.339,-7.37) 45.285,-7.424 45.285,-7.642 45.409,-7.766 45.452,-7.766 45.642,-7.576 45.642,-6.783 44.577,-5.719 42.655,-5.719 41.178,-7.195 41.178,-19.812 41.178,-20.78 41.611,-20.78 41.611,-21.132 41.178,-21.132 41.178,-21.509 41.178,-25.306 41.784,-25.913 41.784,-26.238 42.004,-26.458 42.268,-26.458 42.614,-26.804 42.614,-27.65 42.764,-27.8 42.764,-28.6 43.676,-29.513 44.431,-29.513 45.394,-30.475 46.308,-30.475 46.391,-30.392 46.935,-30.392 46.942,-30.399 47.449,-30.399 47.516,-30.331 48.14,-30.331 48.223,-30.414 48.266,-30.414 48.57,-30.11 v1(48.57,-30.087)
  L10(SIG) w0.069: v1(45.339,-7.37) 45.339,-5.314 J6.51@45.442,-5.211
PL_B35_L16_P: J6.53 U7.G17 | length 40.7
  L1(SIG) w0.069: U7.G17@47.37,-30.51 47.381,-30.51 47.781,-30.91 v1(47.793,-30.91)
  L4(SIG) w0.052: 43.639,-29.692 43.602,-29.692 ; v1(44.984,-7.92) 45.038,-7.866 45.256,-7.866 45.335,-7.944 45.526,-7.944 45.82,-7.65 45.82,-6.709 44.651,-5.54 42.581,-5.54 40.999,-7.121 40.999,-25.38 41.553,-25.935 41.553,-26.259 41.93,-26.636 42.194,-26.636 42.435,-26.878 42.435,-27.724 42.585,-27.874 42.585,-28.674 43.602,-29.692 ; v1(47.793,-30.91) 48.097,-30.604 48.097,-30.54 48.066,-30.51 47.59,-30.51 47.523,-30.577 46.868,-30.577 46.861,-30.57 46.465,-30.57 46.382,-30.654 45.32,-30.654 44.357,-29.692 43.602,-29.692
  L10(SIG) w0.069: J6.53@44.642,-5.211 44.858,-5.426 44.858,-7.69 44.984,-7.816 v1(44.984,-7.92)
PL_B35_L20_N: J6.48 U7.J14 | length 42.1
  L1(SIG) w0.069: U7.J14@44.97,-32.11 44.981,-32.11 45.367,-31.723 v1(45.378,-31.723)
  L4(SIG) w0.052: v1(45.378,-31.723) 44.92,-32.017 42.939,-32.017 42.612,-31.69 42.612,-30.5 41.962,-29.85 41.962,-29.286 41.426,-28.75 41.302,-28.75 41.027,-28.474 41.027,-28.37 40.683,-28.026 40.59,-28.026 40.34,-27.777 40.34,-26.885 39.923,-26.468 39.852,-26.468 39.56,-26.176 39.56,-25.444 39.616,-25.388 39.616,-6.487 41.277,-4.826 45.111,-4.826 46.88,-6.595 46.88,-7.563 46.694,-7.749 v1(46.694,-7.763)
  L10(SIG) w0.069: v1(46.694,-7.763) 46.826,-8.645 47.042,-8.861 J6.48@47.042,-9.611
PL_B35_L20_P: J6.46 U7.K14 | length 43
  L1(SIG) w0.069: U7.K14@44.97,-32.91 44.981,-32.91 45.381,-32.51 v1(45.393,-32.51)
  L4(SIG) w0.052: v1(45.393,-32.51) 44.627,-32.313 ccw(c44.57,-32.532) 44.585,-32.306 42.865,-32.195 42.797,-32.128 42.433,-31.764 42.433,-30.574 41.783,-29.924 41.783,-29.36 41.352,-28.928 41.228,-28.928 40.848,-28.548 40.848,-28.444 40.609,-28.205 40.516,-28.205 40.162,-27.851 40.162,-26.959 39.849,-26.646 39.778,-26.646 39.382,-26.25 39.382,-25.37 39.437,-25.314 39.437,-6.413 41.203,-4.647 45.185,-4.647 47.058,-6.521 47.058,-7.675 47.244,-7.86 v1(47.244,-7.874)
  L10(SIG) w0.069: v1(47.244,-7.874) 47.626,-8.645 47.842,-8.861 J6.46@47.842,-9.611
PL_B35_L22_N: J6.30 U7.L15 | length 40
  L1(SIG) w0.069: U7.L15@45.77,-33.71 46.17,-34.132 v1(46.173,-34.128)
  L4(SIG) w0.052: v1(46.173,-34.128) 46.173,-34.236 46.277,-34.339 46.277,-34.35 46.307,-34.38 46.423,-34.38 46.57,-34.528 47.138,-34.528 47.375,-34.765 47.375,-34.966 47.61,-35.202 48.653,-35.202 52.114,-31.74 53.782,-30.072 53.903,-30.072 53.905,-30.072 ccw(c53.902,-30.021) 53.913,-30.071 53.945,-30.064 ccw(c53.869,-29.722) 54.096,-29.989 ccw(c53.869,-29.722) 54.129,-29.958 57.192,-26.587 ccw(c57.154,-26.553) 57.205,-26.555 cw(c57.295,-26.558) 57.205,-26.554 57.205,-19.052 56.063,-17.91 55.542,-17.91 54.274,-16.642 54.274,-15.547 55.065,-14.756 55.065,-13.84 54.832,-13.608 54.819,-13.608 54.168,-12.957 54.168,-8.202 54.625,-7.746 54.625,-7.677 54.427,-7.48 v1(54.427,-7.447)
  L10(SIG) w0.069: J6.30@54.242,-9.611 54.242,-8.861 54.458,-8.645 54.504,-8.645 54.544,-8.605 54.544,-8.422 54.467,-8.345 54.467,-7.891 54.611,-7.747 54.611,-7.69 54.427,-7.506 v1(54.427,-7.447)
PL_B35_L22_P: J6.28 U7.L14 | length 40.8
  L1(SIG) w0.069: U7.L14@44.97,-33.71 45.281,-34.038 v1(45.27,-34.049)
  L4(SIG) w0.052: v1(45.27,-34.049) 45.328,-34.106 45.573,-34.106 45.598,-34.132 45.674,-34.132 46.101,-34.559 46.349,-34.559 46.496,-34.706 47.064,-34.706 47.196,-34.839 47.196,-35.04 47.536,-35.38 48.727,-35.38 48.779,-35.328 53.856,-30.251 53.903,-30.251 ccw(c53.903,-30.072) 53.907,-30.251 ccw(c53.903,-30.072) 53.914,-30.251 ; 53.915,-30.251 ccw(c53.902,-30.021) 53.952,-30.246 53.984,-30.239 ccw(c53.869,-29.722) 54.211,-30.126 ccw(c53.869,-29.722) 54.261,-30.078 57.324,-26.708 ccw(c57.154,-26.553) 57.384,-26.561 ccw(c57.205,-26.554) 57.384,-26.556 ccw(c57.154,-26.554) 57.384,-26.555 ; v1(54.991,-8.128) 54.991,-8.069 54.794,-7.872 54.751,-7.872 54.347,-8.276 54.347,-12.883 54.893,-13.429 54.906,-13.429 55.243,-13.766 55.243,-14.83 54.452,-15.621 54.452,-16.568 55.616,-17.732 56.137,-17.732 57.384,-18.978 57.384,-26.554
  L10(SIG) w0.069: v1(54.991,-8.128) 54.991,-8.069 54.807,-7.885 54.75,-7.885 54.663,-7.972 54.663,-8.264 54.74,-8.341 54.74,-8.605 54.78,-8.645 54.826,-8.645 55.042,-8.861 J6.28@55.042,-9.611
PL_B35_L23_N: J6.24 U7.M15 | length 45.5
  L1(SIG) w0.069: U7.M15@45.77,-34.51 45.781,-34.51 46.181,-34.91 v1(46.193,-34.91)
  L4(SIG) w0.052: v1(46.193,-34.91) 45.912,-34.91 45.882,-34.94 45.882,-35.095 47.122,-36.335 51.065,-36.335 51.509,-35.892 52.609,-35.892 52.63,-35.892 54.954,-34.061 ccw(c54.737,-33.786) 54.972,-34.046 55.287,-33.761 55.302,-33.746 61.201,-27.848 61.201,-21.645 61.755,-21.091 61.755,-18.126 60.813,-17.184 60.813,-12.63 60.93,-12.513 60.93,-11.034 59.238,-9.342 58.877,-9.342 57.295,-7.76 57.033,-7.76 v1(57.023,-7.751)
  L10(SIG) w0.069: J6.24@56.642,-9.611 56.642,-8.861 56.858,-8.645 56.904,-8.645 56.944,-8.605 56.944,-8.436 57.382,-7.998 57.382,-7.859 57.311,-7.788 57.06,-7.788 v1(57.023,-7.751)
PL_B35_L23_P: J6.22 U7.M14 | length 46.4
  L1(SIG) w0.069: U7.M14@44.97,-34.51 44.97,-34.526 45.293,-34.848 v1(45.293,-34.864)
  L4(SIG) w0.052: v1(45.293,-34.864) 45.338,-34.91 45.673,-34.91 45.703,-34.94 45.703,-35.169 47.048,-36.514 51.139,-36.514 51.583,-36.071 52.704,-36.071 55.066,-34.201 ccw(c54.737,-33.786) 55.09,-34.18 55.376,-33.925 61.38,-27.922 61.38,-21.719 61.934,-21.165 61.934,-18.052 60.992,-17.11 60.992,-12.704 61.109,-12.587 61.109,-10.96 59.312,-9.163 58.951,-9.163 57.422,-7.634 57.422,-7.371 v1(57.412,-7.362)
  L10(SIG) w0.069: v1(57.412,-7.362) 57.449,-7.399 57.449,-7.649 57.578,-7.778 57.578,-8.079 57.14,-8.517 57.14,-8.605 57.18,-8.645 57.226,-8.645 57.442,-8.861 J6.22@57.442,-9.611
PL_B35_L24_N: J6.42 U7.J16 | length 30
  L1(SIG) w0.103: U7.J16@46.581,-32.11 46.581,-32.113 46.974,-32.506 v1(46.981,-32.506)
  L4(SIG) w0.092: v1(46.981,-32.506) 47.381,-32.506 48.163,-31.723 48.163,-30.78 48.416,-30.527 49.955,-30.527 50.646,-29.836 50.673,-29.809 50.678,-29.601 ccw(c50.307,-29.59) 50.673,-29.531 50.673,-22.737 50.646,-22.71 50.163,-22.226 50.136,-9.245 50.109,-9.218 49.53,-8.64 v1(49.53,-7.906)
  L10(SIG) w0.103: J6.42@49.442,-9.611 49.53,-9.523 v1(49.53,-7.906)
PL_CLK_125MHz: R149.2 U7.K17 | length 31.2
  L1(SIG) w0.1: v1(46.971,-33.314) 46.971,-33.311 47.37,-32.913 U7.K17@47.37,-32.91
  L1(SIG) w0.2: R149.2@72.431,-27.292 72.502,-27.363 72.502,-27.887 v1(72.55,-27.934)
  L8(SIG) w0.1: v1(46.971,-33.314) 47.436,-33.779 49.751,-33.779 49.886,-33.915 54.336,-33.915 54.582,-34.161 55.505,-34.161 55.747,-33.919 65.919,-33.919 65.935,-33.935 66.018,-33.935 66.04,-33.913 66.318,-33.913 68.463,-31.768 71.128,-31.768 72.143,-30.753 72.143,-28.617 72.483,-28.277 72.483,-28.001 v1(72.55,-27.934)
PS_CLK_33M333: R71.1 U7.E7 | length 4.6
  L1(SIG) w0.1: v1(39.052,-28.559) 39.052,-28.575 39.37,-28.893 U7.E7@39.37,-28.91
  L10(SIG) w0.1: R71.1@37.068,-26.166 36.995,-26.239 36.995,-27.532 36.988,-27.539 36.988,-27.85 37.208,-28.069 37.216,-28.069 37.259,-28.112 38.607,-28.112 v1@39.052,-28.558
PS_LED: R82.2 R92.1 U7.E6 | length 37.7
  L1(SIG) w0.1: R92.1@22.098,-16.887 22.161,-16.823 23.431,-16.823 R82.2@23.495,-16.76 ; v1(22.452,-17.54) 22.519,-17.473 23.298,-17.473 23.495,-17.276 R82.2@23.495,-16.76 ; R82.2@23.406,-16.798 23.445,-16.76 R82.2@23.495,-16.76 ; v1(38.159,-28.499) U7.E6@38.57,-28.91
  L6(SIG) w0.1: v1(22.452,-17.54) 23.97,-19.058 25.235,-19.058 29.975,-23.798 29.975,-26.479 31.925,-28.428 31.925,-29.841 36.595,-34.51 39.953,-34.51 40.163,-34.3 40.163,-30.927 38.159,-28.922 v1(38.159,-28.499)
PS_NPOR: C103.1 J7.40 R44.2 R70.1 U7.C7 U11.4 | length 87.2
  L1(SIG) w0.1: v1(38.959,-27.721) U7.C7@39.37,-27.31 ; v1(65.347,-30.425) 65.634,-30.712 R44.2@67.01,-30.712
  L4(SIG) w0.1: v1(50.165,-61.599) 51.562,-60.202 51.562,-48.017 56.388,-43.191 56.388,-36.199 60.579,-32.008 62.738,-32.008 64.32,-30.425 v1(65.347,-30.425)
  L8(SIG) w0.1: v1(38.959,-27.721) 39.02,-27.782 39.334,-27.782 39.72,-28.167 39.89,-28.266 40.036,-28.412 40.436,-28.843 40.495,-28.901 40.535,-28.901 41.535,-28.901 42.226,-29.592 42.71,-29.592 42.713,-29.588 42.796,-29.588 43.545,-30.337 44.374,-30.337 44.674,-30.637 44.766,-30.637 45.266,-31.137 45.474,-31.137 45.974,-30.637 46.573,-30.637 46.664,-30.546 51.321,-30.546 51.367,-30.592 59.845,-30.592 60.229,-30.209 60.809,-30.209 60.962,-30.056 61.309,-30.056 61.523,-29.842 62.594,-29.842 62.762,-29.675 63.072,-29.675 63.239,-29.842 64.764,-29.842 v1(65.347,-30.425)
  L10(SIG) w0.1: v1(50.165,-61.599) 50.165,-63.382 J7.40@50.242,-63.459
  L10(SIG) w0.2: U11.4@64.433,-39.366 64.466,-39.366 64.516,-39.416 R70.1@64.516,-40.779 C103.1@66.294,-40.779 66.391,-40.681 66.92,-40.681 66.944,-40.657 66.944,-38.482 65.347,-36.885 v1(65.347,-30.425)
PS_NRST: C102.1 R73.1 R95.2 SW3.34 U7.B10 | length 35.1
  L1(SIG) w0.2: v1(48.895,-21.848) 48.943,-21.895 50.348,-21.895 R95.2@50.427,-21.975 50.427,-22.741 50.952,-23.266 53.616,-23.266 57.023,-26.674 R73.1@57.023,-30.611 ; SW3.34@53.408,-32.727 53.408,-32.527 53.933,-32.002 56.14,-32.002 56.146,-32.008 C102.1@57.158,-32.008 57.098,-31.948 57.098,-30.67 R73.1@57.039,-30.611
  L1(SIG) w0.3: v1(41.38,-26.914) 41.38,-26.907 41.77,-26.517 U7.B10@41.77,-26.51 ; SW3.34@53.408,-36.877 SW3.34@53.408,-32.727
  L10(SIG) w0.1: v1(41.38,-26.914) 41.443,-26.85 41.647,-26.85 42.966,-25.531 44.243,-25.531 44.602,-25.171 44.602,-24.015 44.92,-23.697 46.005,-23.697 47.855,-21.848 v1(48.895,-21.848)
PWR_LED_FET_G: Q1.G R26.2 | length 1.6
  L1(SIG) w0.2: R26.2@82.542,-64.139 84.124,-64.139 Q1.G@84.14,-64.123
QSPI_CLK: R74.2 U7.A5 | length 3
  L1(SIG) w0.103: R74.2@37.719,-22.729 37.77,-22.78 37.77,-23.423 37.723,-23.47 37.723,-24.486 37.77,-24.533 U7.A5@37.77,-25.71
QSPI_DQ0_M3: R58.1 U7.B8 U10.5 | length 19
  L1(SIG) w0.103: R58.1@33.274,-12.823 33.282,-12.831 U10.5@35.119,-12.831 v1(36.576,-12.831) ; U7.B8@40.17,-26.51 40.593,-26.086 v1(40.593,-25.059)
  L8(SIG) w0.088: v1(36.576,-12.831) 39.382,-15.355 39.383,-24.02 39.878,-24.515 40.049,-24.515 v1(40.593,-25.059)
QSPI_DQ1_M1: R64.1 U7.D6 U10.2 | length 17.7
  L1(SIG) w0.103: v1(38.159,-27.699) U7.D6@38.57,-28.11 ; v1(41.611,-15.198) 41.677,-15.265 41.988,-15.265 42.042,-15.319 42.054,-15.319 42.106,-15.371 U10.2@42.859,-15.371 R64.1@44.458,-15.371
  L8(SIG) w0.088: v1(38.159,-27.699) 38.216,-27.641 38.516,-27.641 38.832,-27.325 38.922,-27.325 39.37,-26.877 39.37,-26.81 41.067,-25.113 41.067,-15.706 41.574,-15.198 v1(41.611,-15.198)
QSPI_DQ2_M2: R65.1 U7.B7 U10.3 | length 19.8
  L1(SIG) w0.103: U7.B7@39.37,-26.51 38.993,-26.133 38.993,-21.462 39.102,-21.354 39.243,-21.213 ccw(c39.027,-20.996) 39.027,-20.691 38.764,-20.691 cw(c38.764,-20.385) 38.458,-20.385 cw(c38.764,-20.385) 38.764,-20.079 41.454,-20.079 ccw(c41.454,-19.774) 41.759,-19.774 ccw(c41.454,-19.774) 41.454,-19.468 cw(c41.454,-19.162) 41.148,-19.162 41.148,-15.909 41.148,-14.355 41.402,-14.101 U10.3@42.859,-14.101 42.867,-14.093 R65.1@44.45,-14.093
QSPI_DQ3_M0: R63.1 U7.A6 U10.7 | length 18.1
  L1(SIG) w0.103: R63.1@33.401,-15.76 34.028,-15.76 34.417,-15.371 U10.7@35.119,-15.371 35.246,-15.498 v1(36.318,-15.498) ; v1(38.409,-24.489) 38.476,-24.556 38.476,-24.827 38.57,-24.921 U7.A6@38.57,-25.71
  L8(SIG) w0.088: v1(36.318,-15.498) 36.589,-15.769 36.589,-17.314 36.589,-17.502 ccw(c36.887,-17.502) 36.893,-17.8 37.735,-17.783 cw(c37.741,-18.081) 38.039,-18.075 cw(c37.741,-18.081) 37.747,-18.379 36.504,-18.404 ccw(c36.51,-18.702) 36.212,-18.708 ccw(c36.51,-18.702) 36.516,-19 36.869,-18.993 cw(c36.875,-19.291) 37.173,-19.285 cw(c36.875,-19.291) 36.881,-19.589 ccw(c36.887,-19.887) 36.589,-19.887 36.589,-22.623 36.815,-22.849 36.858,-22.892 36.909,-22.943 38.364,-24.444 v1(38.409,-24.489)
QSPI_NCS: R69.1 U7.A7 U10.1 | length 18.8
  L1(SIG) w0.103: U7.A7@39.37,-25.71 39.37,-25.023 40.132,-24.261 40.169,-24.224 ccw(c39.952,-24.008) 40.169,-23.792 39.765,-23.388 cw(c39.981,-23.172) 39.765,-22.956 cw(c39.981,-23.172) 40.198,-22.956 40.789,-23.547 ccw(c41.005,-23.331) 41.221,-23.547 ccw(c41.005,-23.331) 41.221,-23.115 40.63,-22.524 cw(c40.846,-22.308) 40.63,-22.091 cw(c40.846,-22.308) 41.062,-22.091 41.653,-22.682 ccw(c41.869,-22.466) 42.086,-22.682 ccw(c41.869,-22.466) 42.086,-22.25 41.495,-21.659 cw(c41.711,-21.443) 41.495,-21.227 cw(c41.711,-21.443) 41.927,-21.227 42.33,-21.63 ccw(c42.546,-21.414) 42.763,-21.63 43.053,-21.34 43.053,-19.773 R69.1@43.053,-19.181 ; U10.1@42.859,-16.641 43.933,-16.641 44.196,-16.904 44.196,-17.149 43.234,-18.11 43.234,-19.007 R69.1@43.061,-19.181
SD_CLK: R94.2 U7.D9 | length 3.3
  L1(SIG) w0.103: U7.D9@40.97,-28.11 40.976,-28.11 41.375,-28.508 v1(41.38,-28.508)
  L10(SIG) w0.103: v1(41.38,-28.508) 40.993,-28.121 40.993,-26.685 41.229,-26.45 41.266,-26.45 41.513,-26.203 R94.2@41.513,-26.166
SD_CMD: R90.2 U7.C6 U12.M5 | length 44.6
  L1(SIG) w0.103: U7.C6@38.57,-27.31 38.581,-27.31 38.971,-26.92 v1(38.982,-26.92) ; v1(55.858,-12.987) 55.924,-12.921 55.924,-12.715 U12.M5@56.134,-12.506 ; R90.2@60.522,-11.95 60.579,-11.893 v1(60.579,-11.178)
  L6(SIG) w0.088: v1(38.982,-26.92) 38.97,-26.932 38.97,-27.277 38.271,-27.976 38.005,-27.976 37.76,-27.731 37.76,-24.794 38.477,-24.077 38.477,-19.944 44.823,-13.598 59.783,-13.598 60.578,-12.804 v1@60.578,-11.18 ; v1(55.858,-12.987) 55.858,-12.218 56.872,-11.204 60.554,-11.204 v1(60.579,-11.178)
SD_D0: R86.2 U7.E9 U12.A3 | length 43.5
  L1(SIG) w0.103: v1(40.611,-28.526) 40.611,-28.538 40.97,-28.897 U7.E9@40.97,-28.91 ; v1(56.854,-19.197) 56.891,-19.234 56.891,-19.759 57.082,-19.951 R86.2@57.785,-19.951 57.785,-18.657 U12.A3@57.134,-18.006
  L6(SIG) w0.088: v1(40.611,-28.526) 40.588,-28.503 40.588,-28.11 40.814,-27.884 40.814,-27.213 41.011,-27.016 41.011,-26.483 41.011,-26.439 40.548,-26.439 40.548,-26.052 41.237,-26.052 41.237,-25.664 40.72,-25.664 40.72,-25.277 41.237,-25.277 41.237,-24.889 40.768,-24.889 40.768,-24.501 41.237,-24.501 41.237,-24.114 40.548,-24.114 40.548,-23.726 41.237,-23.726 41.237,-23.339 40.548,-23.339 40.548,-22.951 41.237,-22.951 41.237,-22.564 40.548,-22.564 40.548,-22.176 41.237,-22.176 41.237,-21.788 41.011,-21.788 41.011,-21.694 41.011,-21.603 41.877,-20.738 43.688,-20.738 43.732,-20.738 43.732,-20.402 44.119,-20.402 44.119,-20.961 44.507,-20.961 44.507,-20.402 44.895,-20.402 44.895,-20.961 45.282,-20.961 45.282,-20.402 45.67,-20.402 45.67,-20.961 46.057,-20.961 46.057,-20.402 46.445,-20.402 46.445,-20.961 46.832,-20.961 46.832,-20.402 47.22,-20.402 47.22,-20.961 47.608,-20.961 47.608,-20.402 47.995,-20.402 47.995,-20.961 48.383,-20.961 48.383,-20.402 48.77,-20.402 48.77,-20.876 49.158,-20.876 49.158,-20.738 49.296,-20.738 49.39,-20.832 50.646,-20.832 55.3,-20.832 56.854,-19.277 v1(56.854,-19.197)
SD_D1: R87.2 U7.E8 U12.A4 | length 43.2
  L1(SIG) w0.103: U7.E8@40.17,-28.91 40.181,-28.91 40.581,-29.31 v1(40.593,-29.31) ; v1(55.217,-19.17) 55.151,-19.237 55.151,-19.784 55.318,-19.951 R87.2@55.88,-19.951 55.93,-19.901 55.93,-19.385 56.634,-18.681 U12.A4@56.634,-18.006
  L6(SIG) w0.088: v1(40.593,-29.31) 40.205,-28.922 40.205,-28.59 39.832,-28.217 39.813,-28.217 39.44,-27.844 39.44,-27.804 39.534,-21.302 41.666,-19.17 52.977,-19.17 ; 52.977,-19.169 53.033,-19.17 53.089,-19.17 53.125,-19.17 53.33,-19.17 53.374,-19.17 ccw(c53.374,-18.977) 53.568,-18.977 53.568,-15.488 cw(c53.762,-15.488) 53.762,-15.294 54.71,-15.294 cw(c54.71,-15.488) 54.903,-15.488 cw(c54.71,-15.488) 54.71,-15.682 54.149,-15.682 ccw(c54.149,-15.876) 53.955,-15.876 53.955,-16.651 ccw(c54.149,-16.651) 54.149,-16.845 54.71,-16.845 cw(c54.71,-17.039) 54.903,-17.039 cw(c54.71,-17.039) 54.71,-17.232 54.149,-17.232 ccw(c54.149,-17.426) 53.955,-17.426 ccw(c54.149,-17.426) 54.149,-17.62 54.71,-17.62 cw(c54.71,-17.814) 54.903,-17.814 cw(c54.71,-17.814) 54.71,-18.008 54.149,-18.008 ccw(c54.149,-18.201) 53.955,-18.201 ccw(c54.149,-18.201) 54.149,-18.395 54.71,-18.395 cw(c54.71,-18.589) 54.903,-18.589 cw(c54.71,-18.589) 54.71,-18.783 54.149,-18.783 ccw(c54.149,-18.977) 53.955,-18.977 ccw(c54.149,-18.977) 54.149,-19.17 54.947,-19.17 v1(55.217,-19.17)
SD_D2: R88.2 U7.C5 U12.A5 | length 43.9
  L1(SIG) w0.103: U7.C5@37.77,-27.31 37.77,-27.298 38.143,-26.926 v1(38.143,-26.914) ; v1(52.645,-18.455) 52.705,-18.516 52.705,-19.308 53.348,-19.951 R88.2@53.975,-19.951 53.975,-19.495 54.734,-18.736 55.57,-18.736 55.843,-18.463 55.843,-18.297 U12.A5@56.134,-18.006
  L6(SIG) w0.088: v1(38.143,-26.914) 39.007,-26.05 39.007,-20.686 41.529,-18.165 45.974,-18.165 46.018,-18.165 ccw(c46.018,-17.971) 46.212,-17.971 46.212,-16.42 cw(c46.405,-16.42) 46.405,-16.227 47.336,-16.227 cw(c47.336,-16.42) 47.53,-16.42 cw(c47.336,-16.42) 47.336,-16.614 46.793,-16.614 ccw(c46.793,-16.808) 46.599,-16.808 ccw(c46.793,-16.808) 46.793,-17.002 49.353,-17.002 cw(c49.353,-17.196) 49.546,-17.196 cw(c49.353,-17.196) 49.353,-17.389 46.793,-17.389 ccw(c46.793,-17.583) 46.599,-17.583 ccw(c46.793,-17.583) 46.793,-17.777 48.965,-17.777 cw(c48.965,-17.971) 49.159,-17.971 cw(c48.965,-17.971) 48.965,-18.165 46.793,-18.165 ccw(c46.793,-18.358) 46.599,-18.358 ccw(c46.793,-18.358) 46.793,-18.552 49.353,-18.552 ccw(c49.353,-18.358) 49.546,-18.358 cw(c49.74,-18.358) 49.74,-18.165 49.784,-18.165 52.304,-18.165 52.594,-18.455 v1(52.645,-18.455)